# Altium PCB [R0] Transmitter - BlackChat.PcbDoc
Units mil, origin at the board's own origin, x right, y up, seen from the top; angles counter-clockwise.
Board outline 1080 x 950 mil, 2 copper layers (Top Layer, Bottom Layer); 17 components, 12 nets, 38 pads, 24 vias.
Unrouted connection lines stored in the file: 26.
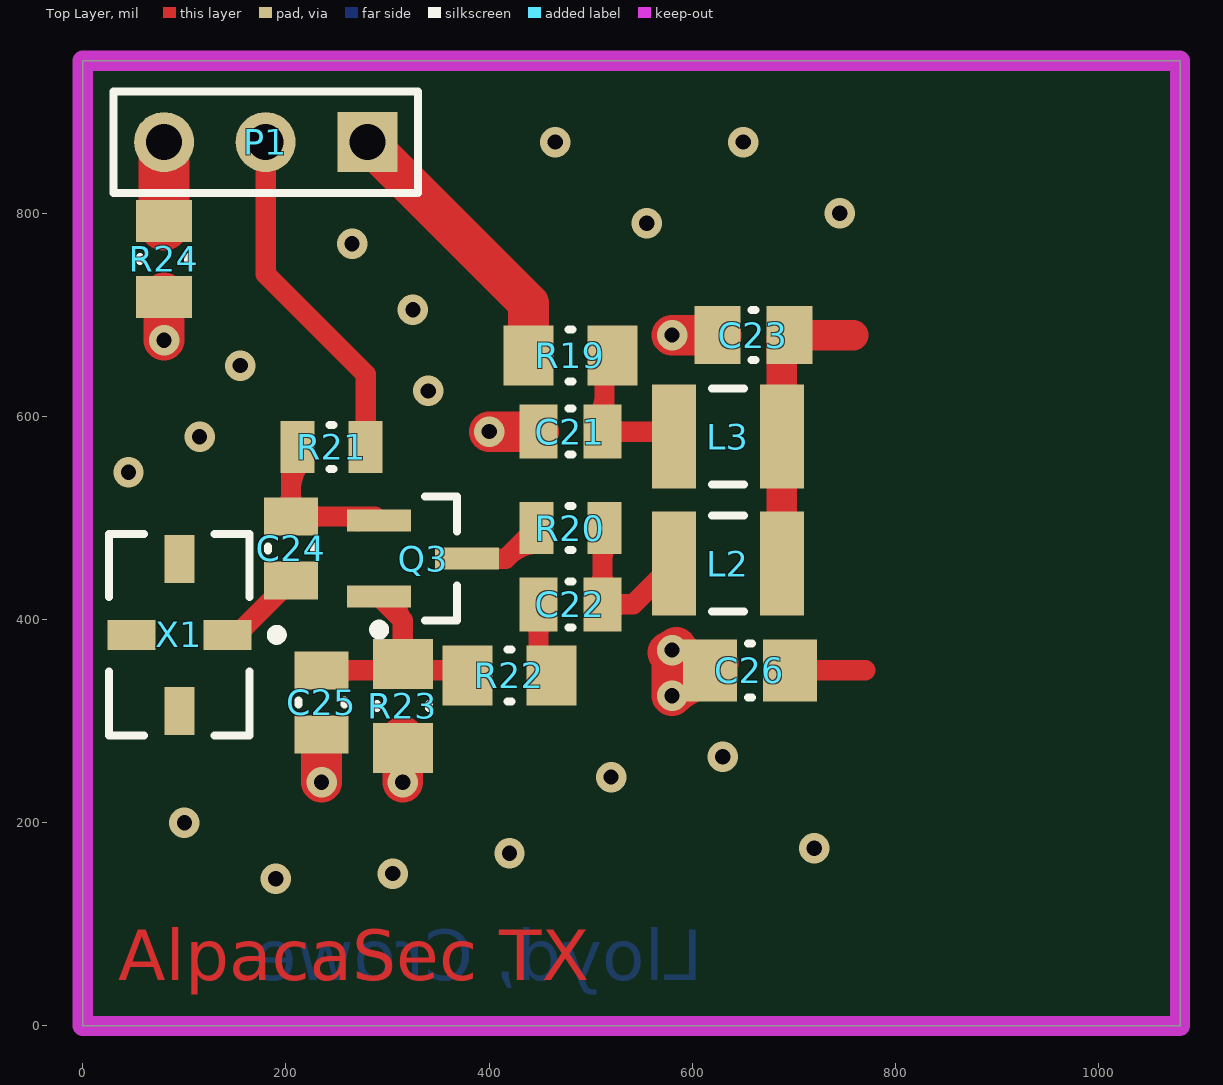
[diagram p0: Top Layer view]
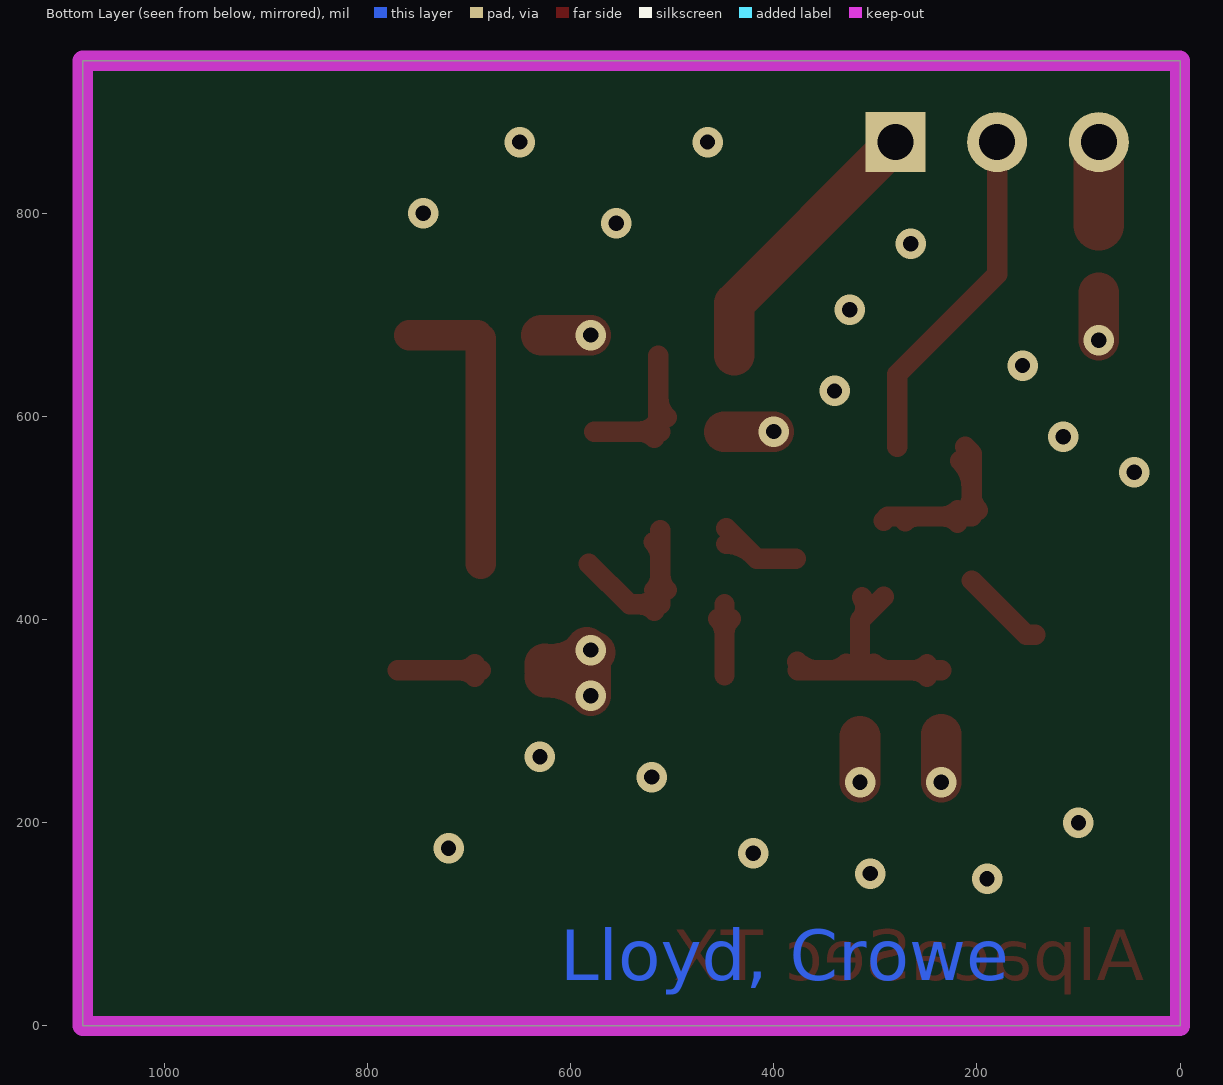
[diagram p1: Bottom Layer view, seen from below]

## Layer stack, top to bottom
Top Layer: signal copper 1.4
Dielectric: dielectric 12.6, FR-4, Dk 4.8
Bottom Layer: signal copper 1.4

## Board outline
0,0 0,950 1080,950 1080,0

## Design rules (kind name [scope] priority, off if disabled: settings)
Clearance [All] p1: gap=10
Length All [All] p1: maxlimit=1969 minlimit=1969
PolygonConnect [All] p1: connectstyle=Relief reliefconductorwidth=10 reliefentries=4 polygonreliefangle="90 Angle" airgapwidth=10
RoutingVias [All] p1: holewidth=28 width=50 viastyle="Through Hole" minholewidth=28 minwidth=50 maxholewidth=28 maxwidth=50
SolderMaskExpansion [All] p1: expansion=4
Width [All] p1: maxlimit=120 minlimit=10 preferedwidth=10 bottomlayer_maxwidth=10 minimp=50.000000 maximp=50.000000 favimp=50.000000
28 further rules are at their usual default settings.

## Components (designator, comment, footprint, x,y, rotation, side; value= is the part's Value field where it differs from the comment)
C21 "CAP 1nF 16V 0805(2012)" CAPC0805(2012)100_L 480,585 r0 top
C22 "CAP 1.8pF 16V 0805(2012)" CAPC0805(2012)75_L 480,415 r0 top
C23 "CAP 3.9pF 16V 0805(2012)" CAPC0805(2012)75_N 660,680 r0 top
C24 "CAP 47pF 16V 0805(2012)" CAPC0805(2012)100_L 205,470 r90 top
C25 "CAP 10pF 16V 0805(2012)" CAPC0805(2012)100_L 235,318.5 r90 top
C26 "CAP 2.2pF 16V 0805(2012)" CAPC0805(2012)75_M 656.5,350 r180 top
L2 "39nH" C1210 635,455 r0 top
L3 "1uH" C1210 635,580 r0 top
P1 "Header 3" HDR1X3 280,870 r180 top
Q3 "NE68033" SOT95P275X120-3N 335,460 r0 top
R19 "22R 5% 0805(2012)" RESC0805(2012)_M 480,660 r180 top
R20 "10R 5% 0805(2012)" RESC0805(2012)_L 480,490 r0 top
R21 "33K 1% 0805(2012)" RESC0805(2012)_L 245,570 r0 top
R22 "22R 5% 0805(2012)" RESC0805(2012)_M 420,345 r0 top
R23 "47R 5% 0805(2012)" RESC0805(2012)_M 315,315 r90 top
R24 "Jumper 0805(2012)" RESC0805(2012)_N 80,755 r270 top
X1 "RO3101A" RO3101A 95,385 r180 top

## Footprints (in the part's own frame and the unit in brackets; to place one, negate y for a bottom-side part, rotate by r counter-clockwise, add the part's x,y. Pads: shape width x height; smd on the part's side, far side on the other; paste and mask are expansions set on the pad)
C1210 [mm] "Chip Capacitor, Body 3.2x2.5mm, IPC High Density"
  rect 1.1x2.6 smd: 1(-1.35,0) 2(1.35,0)
  silkscreen extent -0.4,-1.2 0.4,1.2, body extent -1.7,-1.35 1.7,1.35, height 1.3
CAPC0805(2012)75_L [mm] "Chip Capacitor, Body 2.0x1.2mm, Height 0.75mm, IPC High Density"
  rect 0.95x1.35 smd: 1(-0.8,0) 2(0.8,0)
  silkscreen extent -0.05,-0.58 0.05,0.58, body extent -1.1,-0.72 1.1,0.72, height 0.75
CAPC0805(2012)75_M [mm] "Chip Capacitor, Body 2.0x1.2mm, Height 0.75mm, IPC Low Density"
  rect 1.35x1.55 smd: 1(-1,0) 2(1,0)
  silkscreen extent -0.05,-0.67 0.05,0.67, body extent -1.1,-0.72 1.1,0.72, height 0.75
CAPC0805(2012)75_N [mm] "Chip Capacitor, Body 2.0x1.2mm, Height 0.75mm, IPC Medium Density"
  rect 1.15x1.45 smd: 1(-0.9,0) 2(0.9,0)
  silkscreen extent -0.05,-0.62 0.05,0.63, body extent -1.1,-0.72 1.1,0.73, height 0.75
CAPC0805(2012)100_L [mm] "Chip Capacitor, Body 2.0x1.2mm, Height 1.0mm, IPC High Density"
  rect 0.95x1.35 smd: 1(-0.8,0) 2(0.8,0)
  silkscreen extent -0.05,-0.58 0.05,0.58, body extent -1.1,-0.72 1.1,0.72, height 1
HDR1X3 [mm] "Connector; Header; 3 Position"
  rect 1.5x1.5 hole 0.9: 1(0,0)
  round 1.5 hole 0.9: 2(2.54,0) 3(5.08,0)
  silkscreen extent -1.27,-1.27 6.35,1.27
RESC0805(2012)_L [mm] "Chip Resistor, Body 2.0x1.3mm, IPC High Density"
  rect 0.85x1.3 smd: 1(-0.85,0) 2(0.85,0)
  silkscreen extent -0.05,-0.55 0.05,0.55, body extent -1.1,-0.67 1.1,0.68, height 0.7
RESC0805(2012)_M [mm] "Chip Resistor, Body 2.0x1.3mm, IPC Low Density"
  rect 1.25x1.5 smd: 1(-1.05,0) 2(1.05,0)
  silkscreen extent -0.05,-0.65 0.05,0.65, body extent -1.1,-0.67 1.1,0.67, height 0.7
RESC0805(2012)_N [mm] "Chip Resistor, Body 2.0x1.3mm, IPC Medium Density"
  rect 1.05x1.4 smd: 1(-0.95,0) 2(0.95,0)
  silkscreen extent -0.05,-0.6 0.05,0.6, body extent -1.1,-0.67 1.1,0.68, height 0.7
RO3101A [mm] "433.92 MHz  SAW  Resonator"
  rect 1.2x0.75 smd: 1(-1.2,0) 3(1.2,0)
  rect 0.75x1.2 smd: 2(0,-1.9) 4(0,1.9)
  silkscreen extent -2.56,-2.51 1.75,2.51, body extent -1.7,-2.49 1.8,2.57, height 1.25
SOT95P275X120-3N [mm] "SOT23, 3-Leads, Body 2.90x2.75mm, Pitch 0.95mm, IPC Medium Density"
  rect 1.6x0.55 smd: 1(-1.1,-0.95) 2(-1.1,0.95) 3(1.1,0)
  silkscreen extent -1.22,-1.9 0.85,1.55, body extent -0.85,-1.55 0.85,1.55, height 1.2

## Part data
C21: library part CMP-1036-02955-1, "CAP 1nF 16V ±1% 0805 (2012 Metric) Thickness 1mm SMD"
C22: library part CMP-1036-00213-1, "CAP 1.8pF 16V ±0.1pF 0805 (2012 Metric) Thickness 0.75mm SMD"
C23: library part CMP-1036-00461-1, "CAP 3.9pF 16V ±0.1pF 0805 (2012 Metric) Thickness 0.75mm SMD"
C24: library part CMP-1036-01589-1, "CAP 47pF 16V ±0.5pF 0805 (2012 Metric) Thickness 1mm SMD"
C25: library part CMP-1036-00830-1, "CAP 10pF 16V ±0.25pF 0805 (2012 Metric) Thickness 1mm SMD"
C26: library part CMP-1036-00267-1, "CAP 2.2pF 16V ±0.1pF 0805 (2012 Metric) Thickness 0.75mm SMD"
L2 L3: library part Inductor, "Generic Inductor"
P1: "Header, 3-Pin"
Q3: "NPN SILICON HIGH FREQUENCY TRANSISTOR"
R19 R22: library part CMP-1013-00034-1, "22R 0.125W 5% 0805 (2012 Metric)  SMD"
R20: library part CMP-1013-00026-1, "10R 0.125W 5% 0805 (2012 Metric)  SMD"
R21: library part CMP-1013-00680-1, "33K 0.125W 1% 0805 (2012 Metric)  SMD"
R23: library part CMP-1013-00042-1, "47R 0.125W 5% 0805 (2012 Metric)  SMD"
R24: library part CMP-1013-00001-1, "Jumper 0805 (2012 Metric)"
X1: "433.92 MHz  SAW  Resonator"

## Via types
v1: diameter 30, hole 15, Top Layer to Bottom Layer, 24 vias

## Nets (pads, with @x,y where several pads share a name; then routed paths per layer and width w, separated by ;. In a path a pad name is that pad's centre, name@x,y a point inside that pad or via, vN(x,y) a via of type N, cw(c..) or ccw(c..) an arc to the next point about the centre after c; other vN are vias at no path point)
3V3: P1.1 R19.2 | length 275.7
  Top Layer w40: P1.1 438.66,711.34 R19.2
AGND: C21.1 C23.1 C25.1 C26.2 R23.1 R24.2 X1.2 X1.3 X1.4 | length 595.5
  Top Layer w40: v1(80,675) R24.2@80,721.54 ; v1(235,240) C25.1 ; v1(315,240) R23.1 R23.1@315,285.04 ; v1(400,585) C21.1 ; v1@575.59,367.65 ccw(c605,383.33) C26.2@605,350 ; v1@576.46,366.46 ccw(c616.21,406.21) C26.2@616.21,350 ; v1(580,680) C23.1@628.5,680 ; v1@584.08,372.89 cw(c553.64,351.37) v1(580,325) ; C26.2@625.01,343.43 ccw(c624.48,280.52) v1(580,325) ; C26.2@625,350 C26.2 C26.2@605,350 ; C26.2@625.18,356.59 cw(c618.52,403.51) v1@585,370 ; v1(580,325) v1(580,370) v1@585,370 ; v1(580,325) C26.2@605,350 ; v1@585,370 C26.2@605,350
  other v1: 190,145 305,150 420,170 720,175 100,200 520,245 630,265 45,545 115,580 340,625 155,650 325,705 265,770 555,790 745,800 465,870 650,870
ANTENNA: C23.2 C26.1 L2.2 L3.2 | length 403.7
  Top Layer w20: C26.1@687.99,350 C26.1 770,350 ; C26.1@694.14,343.85 cw(c709,328.99) 709,350 cw(c709,371.01) C26.1@694.14,356.15
  Top Layer w30: L2.2 L3.2 C23.2@688.15,676.65 ; C23.2@691.5,680 758.5,680
DATA_TX: P1.2 R21.2 | length 340.8
  Top Layer w20: P1.2 180,740 278.46,641.54 R21.2
DGND: P1.3 R24.1 | length 81.5
  Top Layer w50: R24.1@80,788.46 P1.3
NetC21_2: C21.2 L3.1 R19.1 | length 193.2
  Top Layer w20: C21.2@505.34,599.03 ccw(c485.74,618.63) 513.46,618.63 ; C21.2 L3.1@576.85,585 ; C21.2@513.46,586.97 R19.1@513.46,660 ; C21.2@517.65,578.85 cw(c532.5,563.99) 532.5,585 cw(c532.5,606.01) C21.2@517.65,591.15
NetC22_1: C22.1 R22.2 | length 103
  Top Layer w20: C22.1@442.35,400.97 cw(c427.59,386.22) 448.46,386.22 ; R22.2@448.46,345 C22.1 ; 448.46,386.03 cw(c469.6,386.03) C22.1@454.66,400.97
NetC22_2: C22.2 L2.1 R20.2 | length 244
  Top Layer w20: C22.2@505.34,429.03 ccw(c490.49,443.88) 511.5,443.88 ccw(c532.5,443.88) C22.2@517.65,429.03 ; 511.5,460.14 cw(c534.47,460.14) R20.2@518.23,476.38 ; R20.2@511.5,488.03 C22.2 541.85,415 L2.1 ; C22.2@517.65,408.85 cw(c532.5,393.99) 532.5,415 cw(c532.5,436.01) C22.2@517.65,421.15
NetC24_1: C24.1 X1.1 | length 84.9
  Top Layer w20: X1.1 151.5,385 C24.1
NetC24_2: C24.2 Q3.2 R21.1 | length 268.4
  Top Layer w20: C24.2@198.85,507.65 ccw(c183.99,522.5) 205,522.5 ccw(c226.01,522.5) C24.2@211.15,507.65 ; 205,529.11 cw(c243.57,529.11) R21.1@216.3,556.38 ; R21.1 205,563.46 C24.2 287.6,501.5 Q3.2 ; C24.2@219.03,495.34 cw(c233.88,480.49) 233.88,501.5 cw(c233.88,522.5) C24.2@219.03,507.65 ; 259.14,501.5 cw(c259.14,485.52) Q3.2@270.44,496.82
NetC25_2: C25.2 Q3.1 R22.1 R23.2 | length 338.9
  Top Layer w20: C25.2 R22.1@376.54,350 ; C25.2@249.03,343.85 cw(c263.88,328.99) 263.88,350 cw(c263.88,371.01) C25.2@249.03,356.15 ; 285.14,350 ccw(c285.14,372.97) R23.2@301.38,356.73 ; Q3.1 315,399.29 ; Q3.1@313.04,422.12 ccw(c327.58,411.87) 315,399.29 ; R23.2@315,351.97 R23.2 315,399.29 ; R23.2@328.62,356.73 ccw(c344.86,372.97) 344.86,350 ; R22.1@355.97,350 ccw(c355.97,379.43) R22.1@376.78,358.62
NetQ3_3: Q3.3 R20.1 | length 110.2
  Top Layer w20: Q3.3 416.54,460 R20.1 ; 419.92,463.39 cw(c446.54,436.77) R20.1@446.54,474.41

## Polygon pours and split planes (outlines as drawn)
AGND on Bottom Layer "Ground Plane" (solid, remove dead copper, pour order 4): -1015,1156.01 -1015,320.5 -365,320.5 -365,1156.01
AGND on Top Layer "Ground Plane" (solid, remove dead copper, pour order 3): 1240.85,965.93 1240.85,130 1890.67,130 1890.67,965.93

## Keep-outs
Keep-Out Layer:
  the board outline again, w20

## Other copper
Top Layer:
  text "AlpacaSec TX" at 35,45 h50
Bottom Layer:
  text "Lloyd, Crowe" at 610,45 h50